# EAGLE board board_d-01-main (EAGLE 8.1.1)
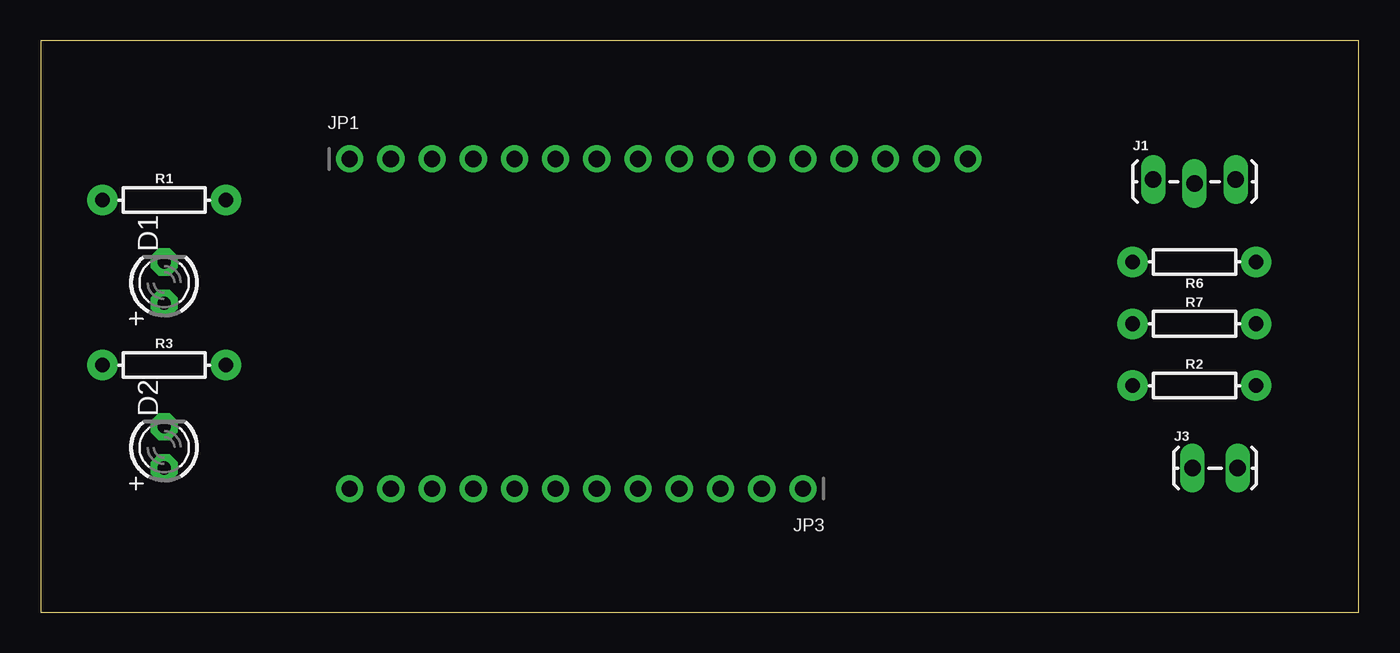
[diagram p0: board, top side]
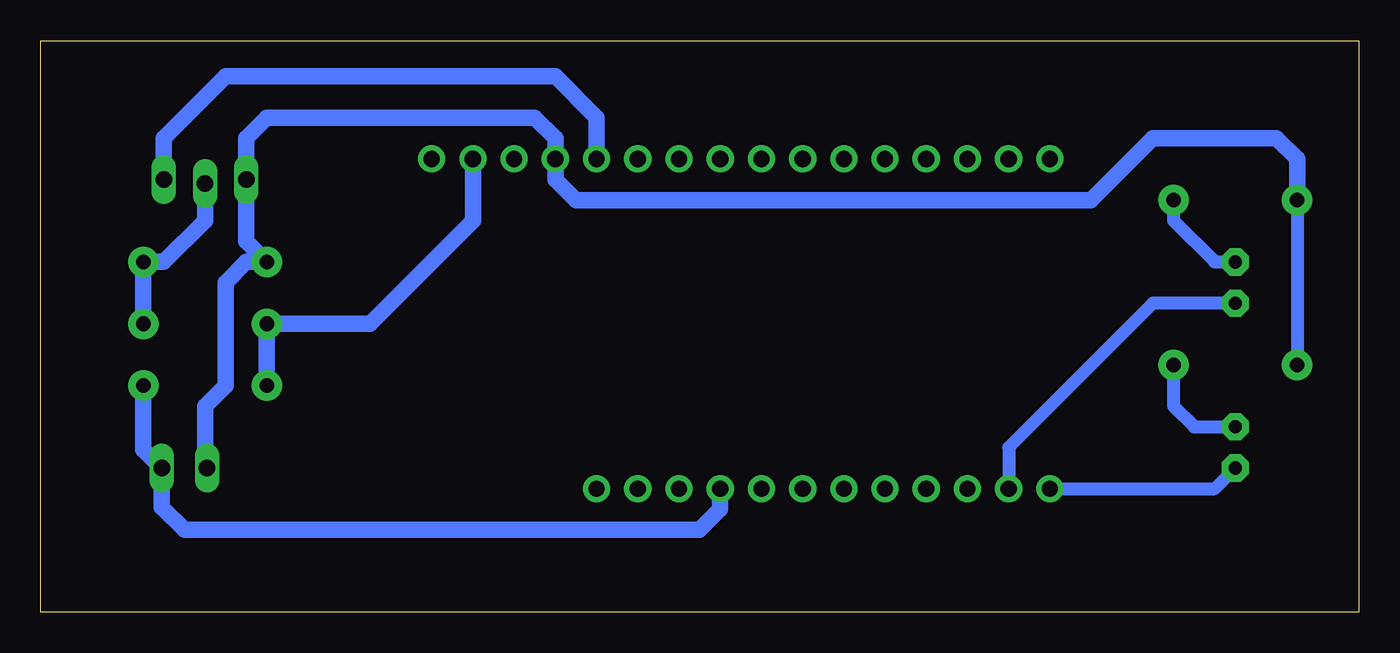
[diagram p1: board, bottom side, seen from below]

Size 81.26 x 35.23 mm. Coordinates in mm from the lower left corner, seen from the top.
Outline: 0,0 81.26,0 81.26,35.23 0,35.23 0,0
Copper layers (1*16): Top 0.035mm / dielectric 1.5mm / Bottom 0.035mm
Design rules "default": minimum track width 10mil, minimum drill 24mil, track to track 8mil, track to pad 8mil, pad to pad 8mil, via to via 8mil, smd to smd 8mil, copper to edge 40mil, drill to drill 8mil, minimum pad ring 10mil, minimum via ring 8mil, stop-mask expansion 4mil, vias tented up to drill 0mil, thermal gap 10mil

## Footprints (pad centres in the part's own frame; a part is rotated, then mirrored left to right if it is on the bottom)
LED3MM = drill 0.813 pad 1.676 octagon: A -1.27,0; K 1.27,0
1X03_LOCK_LONGPADS = drill 1.016 long: 1 0,0; 2 2.54,-0.254; 3 5.08,0
1X02_LOCK_LONGPADS = drill 1.016 long: 1 -0.127,0; 2 2.667,0
1X16_ROUND = drill 1 pad 1.676: 1 -19.05,0; 2 -16.51,0; 3 -13.97,0; 4 -11.43,0; 5 -8.89,0; 6 -6.35,0; 7 -3.81,0; 8 -1.27,0; 9 1.27,0; 10 3.81,0; 11 6.35,0; 12 8.89,0; 13 11.43,0; 14 13.97,0; 15 16.51,0; 16 19.05,0
1X12_ROUND = drill 1 pad 1.676: 1 -13.97,0; 2 -11.43,0; 3 -8.89,0; 4 -6.35,0; 5 -3.81,0; 6 -1.27,0; 7 1.27,0; 8 3.81,0; 9 6.35,0; 10 8.89,0; 11 11.43,0; 12 13.97,0
AXIAL-0.3 = drill 0.9 pad 1.88: P$1 -3.81,0; P$2 3.81,0

## Placement (x,y rotation side)
D1  YLW  [LED3MM]  7.62,20.32 90 top
D2  GRN  [LED3MM]  7.62,10.16 90 top
J1  [1X03_LOCK_LONGPADS]  68.58,26.67 0 top
J3  [1X02_LOCK_LONGPADS]  71.12,8.89 0 top
JP1  [1X16_ROUND]  38.1,27.94 0 top
JP3  [1X12_ROUND]  33.02,7.62 180 top
R1  220  [AXIAL-0.3]  7.62,25.4 0 top
R2  160  [AXIAL-0.3]  71.12,13.97 0 top
R3  220  [AXIAL-0.3]  7.62,15.24 0 top
R6  220  [AXIAL-0.3]  71.12,21.59 180 top
R7  560  [AXIAL-0.3]  71.12,17.78 0 top

## Library data of the parts
D1 D2 = adafruit
J1 J3 = SparkFun-Connectors
JP1 JP3 = microbuilder
R1-R3 R6 R7 = SparkFun-Resistors; PROD_ID: RES-12182

## Nets
3.3V: JP1.15 R2.P$1 R7.P$1
ADC: J1.3 JP1.12
CH_PD: JP1.1
GND: J1.1 J3.1 JP1.13 R1.P$1 R3.P$1 R6.P$2
GPIO0: JP3.8
GPIO2: JP3.10
GPIO4/SDA: D2.A JP3.12
GPIO5/SCL: D1.A JP3.11
GPIO14: J3.2 JP3.4 R2.P$2
GPIO15: JP3.7
GPIO16: JP3.9
MI: JP1.4
MO: JP1.5
N$1: D1.K R1.P$2
N$2: D2.K R3.P$2
N$3: J1.2 R6.P$1 R7.P$2
RXD: JP1.3
SCK: JP1.6
TXD: JP1.2

## Tracks (layer width: path | path; a pad name or v marks a point on that pad's centre or on a via)
3.3V
  Bottom 1.016: R2.P$1 R7.P$1 60.96,17.78 54.61,24.13 JP1.15
ADC
  Bottom 1.016: J1.3 73.66,29.21 69.85,33.02 49.53,33.02 46.99,30.48 JP1.12
GND
  Bottom 0.813: R1.P$1 R3.P$1
  Bottom 1.016: R1.P$1 3.81,27.94 5.08,29.21 12.7,29.21 16.51,25.4 48.26,25.4 49.53,26.67 JP1.13 49.53,29.21 50.8,30.48 67.31,30.48 68.58,29.21 J1.1 68.58,22.86 R6.P$2 68.58,21.59 69.85,20.32 69.85,13.97 71.12,12.7 71.12,9.02 J3.1
GPIO4/SDA
  Bottom 0.813: JP3.12 8.89,7.62 D2.A
GPIO5/SCL
  Bottom 0.813: D1.A 12.7,19.05 21.59,10.16 JP3.11
GPIO14
  Bottom 1.016: R2.P$2 74.93,10.03 J3.2 73.79,6.48 72.39,5.08 40.64,5.08 39.37,6.35 JP3.4
N$1
  Bottom 0.813: R1.P$2 11.43,24.13 8.89,21.59 D1.K
N$2
  Bottom 0.813: D2.K 10.16,11.43 11.43,12.7 R3.P$2
N$3
  Bottom 1.016: R7.P$2 R6.P$1 73.66,21.59 71.12,24.13 J1.2